# Altium PCB S28A模块化小车底板.pcbdoc (part 1 of 2)
Units mil, origin at the board's own origin, x right, y up, seen from the top; angles counter-clockwise.
Board outline 5579.41 x 4352.55 mil, 2 copper layers (Top Layer, Bottom Layer); 38 components, 47 nets, 158 pads, 338 vias.
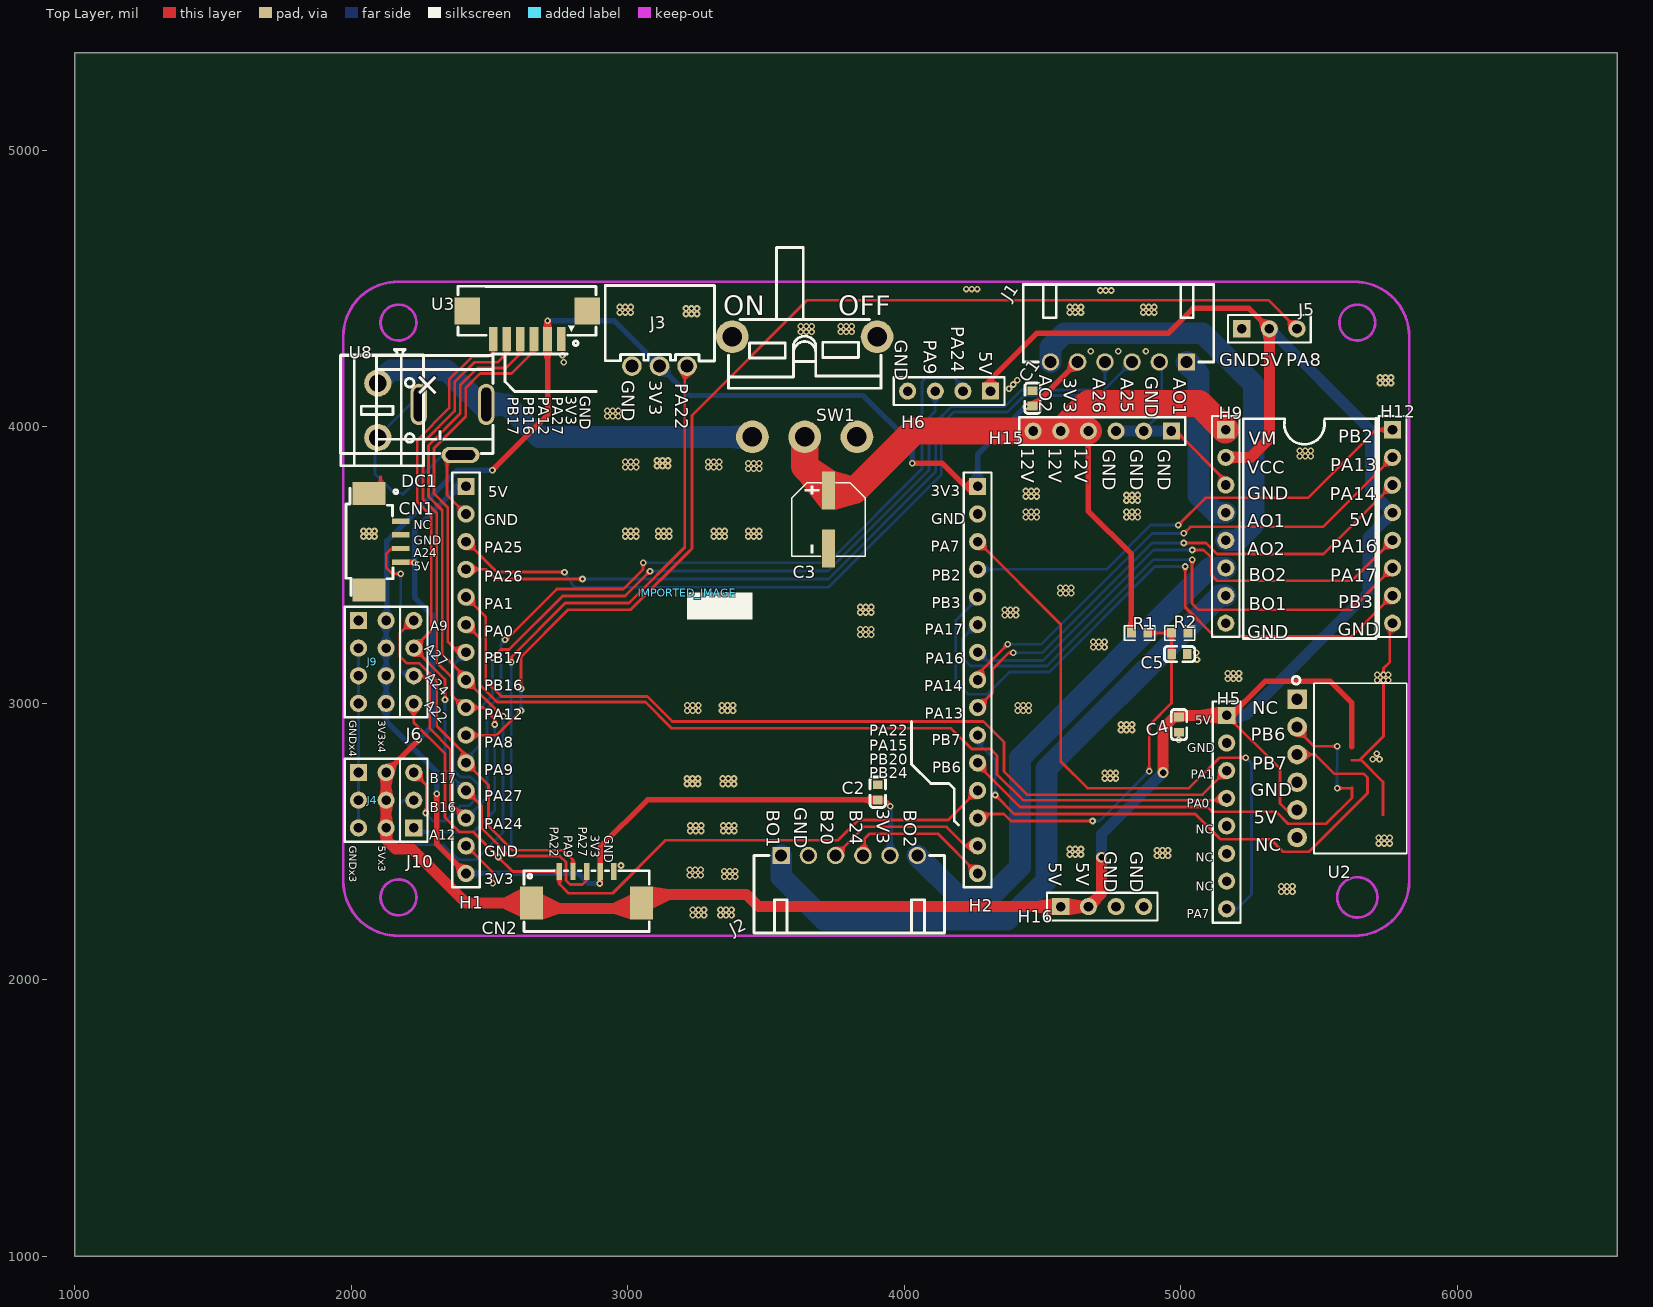
[diagram p0: Top Layer view]
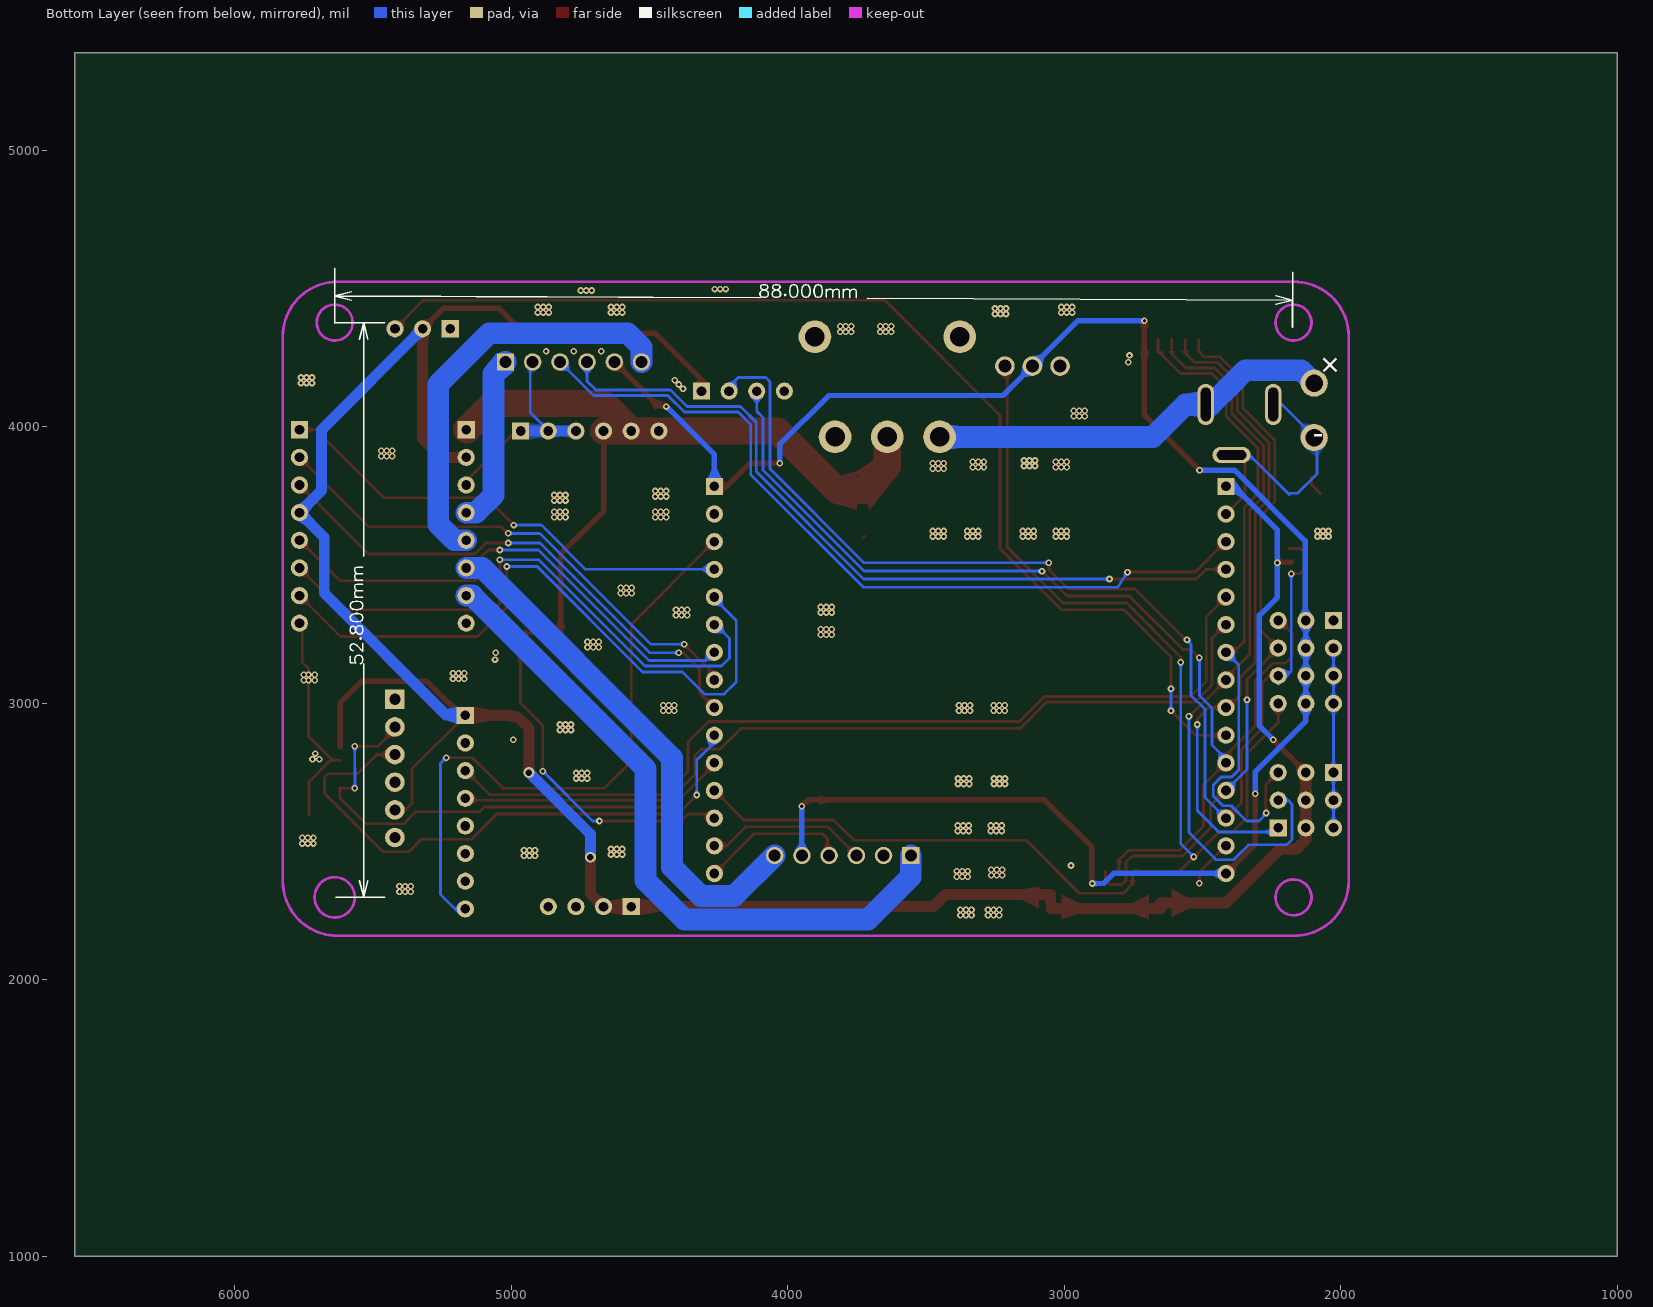
[diagram p1: Bottom Layer view, seen from below]

## Layer stack, top to bottom
Top Layer: signal copper (thickness not stored)
Dielectric: dielectric 12.6, FR-4, Dk 4.8
Bottom Layer: signal copper (thickness not stored)

## Board outline
6579.41,1000 1000,1000 1000,5352.55 6579.41,5352.55

## Components (designator, comment, footprint, x,y, rotation, side; value= is the part's Value field where it differs from the comment)
C1 "0.1u" C0603 4464.41,4102.55 r270 top
C2 "0.1u" C0603 3904.41,2677.55 r270 top
C3 "220uF" CAP-SMD_BD6.3-L6.6-W6.6-LS7.4-FD 3726.54,3663.93 r270 top
C4 "0.1u" C0603 4994.41,2922.55 r90 top
C5 "0.1u" C0603 4995.91,3177.55 r180 top
CN1 "1.25-4P WT" CONN-SMD_1.25-4PWT 2121.54,3583.93 r90 top
CN2 "1.25-5P WT" CONN-SMD_1.25-5PWT 2851.54,2333.93 r180 top
DC1 "DC-005A-20A" DC-IN-TH_DC-005A-20A 2366.54,3988.93 r90 top
H1 "HDR-F-2.54_1x15" HDR-F-2.54_1X15 2415.36,3083.93 r270 top
H2 "C8T6" HDR-F-2.54_1X15 4265.74,3083.93 r270 top
H5 "MPU6050" HDR-F-2.54_1X8 5166.53,2655.82 r270 top
H6 "超声波" HDR-F-2.54_1X4 4162.6,4128.26 r180 top
H9 "HDR-F-2.54_1x8" HDR-F-2.54_1X8 5163.38,3688.93 r270 top
H12 "HDR-F-2.54_1x8" HDR-F-2.54_1X8 5766.54,3688.93 r270 top
H15 "12TO5" HDR-F-2.54_1X6 4766.53,3983.93 r180 top
H16 "12TO5" HDR-F-2.54_1X4 4716.53,2263.93 r0 top
IMPORTED_IMAGE "IMPORTED_IMAGE" IMPORTED_IMAGE 3215.32,3398.42 r0 top
J1 "X8821WR-06S-N0SN" CONN-TH_6P-P2.50_X8821WR-06S-N2SN 4775.27,4233.93 r180 top
J2 "X8821WR-06S-N0SN" CONN-TH_6P-P2.50_X8821WR-06S-N2SN 3801.54,2448.93 r0 top
J3 "XH-3AW_C2908612" CONN-TH_3P-P2.54_HCTL_XH-3AW 3115.28,4218.93 r0 top
J4 "HDR-M-2.54_2x3" HDR-M-2.54_2X3 2026.54,2748.93 r270 top
J5 "舵机接口" HDR-M-2.54_1X3 5320.9,4353.93 r0 top
J6 "HDR-M-2.54_1x4" HDR-M-2.54_1X4 2226.54,3148.93 r90 top
J9 "HDR-M-2.54_2x4" HDR-M-2.54_2X4 2076.54,3148.93 r270 top
J10 "HDR-M-2.54_1x3" HDR-M-2.54_1X3 2226.54,2648.93 r90 top
R1 "10k" R0603 4851.54,3253.93 r0 top
R2 "1k" R0603 4996.54,3253.93 r0 top
SW1 "SS-12D11G5" SW-TH_SS-12D11G5 3640.27,4143.93 r180 top
U2 "DW254W-11-06-85" CONN-TH_6P-P2.54_DEALON_DW254W-11-06-85 5421.54,2763.93 r270 top
U3 "HC-1.25-6PWT" CONN-SMD_6P-P1.25_HC-1.25-6PWT 2636.54,4367.55 r180 top
U8 "DB301V-5.0-2P-BU-P" CONN-TH_2P-P5.00_DB301V-5.0-2P-BU-P 2096.54,4058.93 r90 top
? "" ? 3906.67,4466.2 r0 top
? "" ? 5546.08,3336.92 r0 top
? "" ? 3404.04,2012.7 r0 top
? "" ? 3269.04,1945.46 r0 top
? "" ? 5665.84,3321.43 r0 top
? "" ? 1769.27,2858.93 r0 top
? "" ? 5409.04,2061.33 r0 top

## Footprints (in the part's own frame and the unit in brackets; to place one, negate y for a bottom-side part, rotate by r counter-clockwise, add the part's x,y. Pads: shape width x height; smd on the part's side, far side on the other; paste and mask are expansions set on the pad)
C0603 [mm]
  rect 0.8x0.9 smd paste+0 mask+0.051: 1(-0.7,0) 2(0.7,0)
  silkscreen extent -1.41,-0.71 1.39,0.72
CAP-SMD_BD6.3-L6.6-W6.6-LS7.4-FD [mm]
  rect 3.5x1.2 smd paste+0 mask+0.051: 1(-2.67,0) 2(2.67,0)
  silkscreen extent -3.38,-3.38 3.38,3.38
CONN-SMD_1.25-4PWT [mm]
  rect 0.5x1.6 smd paste+0 mask+0.051: 1(1.875,-1.45) 2(0.625,-1.45) 3(-0.625,-1.45) 4(-1.875,-1.45)
  rect 2.1x3 smd paste+0 mask+0.051: 5(4.425,1.45) 6(-4.425,1.45)
  silkscreen extent -4.95,-1.2 4.9,3.55
CONN-SMD_1.25-5PWT [mm]
  rect 0.5x1.6 smd paste+0 mask+0.051: 1(2.5,-1.45) 2(1.25,-1.45) 3(0,-1.45) 4(-1.25,-1.45) 5(-2.5,-1.45)
  rect 2.1x3 smd paste+0 mask+0.051: 6(5.05,1.45) 7(-5.05,1.45)
  silkscreen extent -5.75,-1.52 5.75,4.05
CONN-SMD_6P-P1.25_HC-1.25-6PWT [mm]
  rect 0.8x2.2 smd paste+0 mask+0.05: 1(-3.125,1.3) 2(-1.875,1.3) 3(-0.625,1.3) 4(0.625,1.3) 5(1.875,1.3) 6(3.125,1.3)
  rect 2.35x2.5 smd paste+0 mask+0.05: 7(-5.505,-1.3) 8(5.505,-1.3)
  silkscreen extent -6.33,-3.56 6.35,1.88
CONN-TH_2P-P5.00_DB301V-5.0-2P-BU-P [mm]
  round 2.5 hole 1.6 paste+0 mask+0.051: 1(-2.5,0) 2(2.5,0)
  silkscreen extent -5.08,-4.2 5.59,3.4
CONN-TH_3P-P2.54_HCTL_XH-3AW [mm]
  round 1.8 hole 1.199 paste+0 mask+0.051: 1(-2.54,0) 2(0.001,0) 3(2.54,0)
  silkscreen extent -4.98,0.46 5.04,7.4
CONN-TH_6P-P2.50_X8821WR-06S-N2SN [mm]
  rect 1.6x1.6 hole 1.1 paste+0 mask+0.051: 1(-6.25,0)
  round 1.6 hole 1.1 paste+0 mask+0.051: 2(-3.75,0) 3(-1.25,0) 4(1.25,0) 5(3.75,0) 6(6.25,0)
  silkscreen extent -8.75,-7.11 8.75,0
CONN-TH_6P-P2.54_DEALON_DW254W-11-06-85 [mm]
  rect 1.8x1.8 hole 1.02 paste+0 mask+0.05: 1(-6.35,0)
  round 1.8 hole 1.02 paste+0 mask+0.05: 2(-3.81,0) 3(-1.27,0) 4(1.27,0) 5(3.81,0) 6(6.35,0)
  silkscreen extent -8.46,-0.46 7.82,10.05
DC-IN-TH_DC-005A-20A [mm]
  oval 3.8x1.5 hole 0.9 slot 3.1 at 0 deg paste+0 mask+0.051: 1(2.325,-3.1) 2(2.325,3.1)
  oval 1.5x3.5 hole 0.9 slot 2.7 at 90 deg paste+0 mask+0.051: 3(-2.325,-0.722)
  silkscreen extent -2.17,-3.72 6.83,10.28
HDR-F-2.54_1X4 [mil]
  rect 62x62 hole 35 paste+0 mask+2: 1(-150,0)
  round 62 hole 35 paste+0 mask+2: 2(-50,0) 3(50,0) 4(150,0)
  silkscreen extent -200,-50 200,50
HDR-F-2.54_1X6 [mil]
  rect 62x62 hole 35 paste+0 mask+2: 1(-200,0)
  round 62 hole 35 paste+0 mask+2: 2(-100,0) 3(0,0) 4(100,0) 5(200,0) 6(300,0)
  silkscreen extent -250,-50 350,50
HDR-F-2.54_1X8 [mil]
  rect 62x62 hole 35 paste+0 mask+2: 1(-300,0)
  round 62 hole 35 paste+0 mask+2: 2(-200,0) 3(-100,0) 4(0,0) 5(100,0) 6(200,0) 7(300,0) 8(400,0)
  silkscreen extent -350,-50 450,50
HDR-F-2.54_1X15 [mil]
  rect 62x62 hole 35 paste+0 mask+2: 1(-700,0)
  round 62 hole 35 paste+0 mask+2: 2(-600,0) 3(-500,0) 4(-400,0) 5(-300,0) 6(-200,0) 7(-100,0) 8(0,0) 9(100,0) 10(200,0) 11(300,0) 12(400,0) 13(500,0) 14(600,0) 15(700,0)
  silkscreen extent -750,-50 750,50
HDR-M-2.54_1X3 [mil]
  rect 62x62 hole 35 paste+0 mask+2: 1(-100,0)
  round 62 hole 35 paste+0 mask+2: 2(0,0) 3(100,0)
  silkscreen extent -150,-50 150,50
HDR-M-2.54_1X4 [mil]
  round 62 hole 35 paste+0 mask+2: 1(-150,0) 2(-50,0) 3(50,0) 4(150,0)
  silkscreen extent -200,-50 200,50
HDR-M-2.54_2X3 [mil]
  rect 62x62 hole 35 paste+0 mask+2: 1(0,0)
  round 62 hole 35 paste+0 mask+2: 2(0,100) 3(100,0) 4(100,100) 5(200,0) 6(200,100)
  silkscreen extent -50,-50 250,150
HDR-M-2.54_2X4 [mil]
  rect 62x62 hole 35 paste+0 mask+2: 1(-150,-50)
  round 62 hole 35 paste+0 mask+2: 2(-150,50) 3(-50,-50) 4(-50,50) 5(50,-50) 6(50,50) 7(150,-50) 8(150,50)
  silkscreen extent -200,-100 200,100
IMPORTED_IMAGE [mil]
  silkscreen extent 0,-94 236,0
R0603 [mil]
  rect 31.75x34.02 smd paste-3937.01 mask+2: 1(-29.65,0) 2(29.66,0)
  silkscreen extent -55,-26 55,26
SW-TH_SS-12D11G5 [mm]
  round 3 hole 1.8 paste+0 mask+0.051: 1(4.8,4.6) 2(0,4.6) 3(-4.8,4.6) 4(-6.65,-4.6) 5(6.65,-4.6)
  silkscreen extent -7,-12.81 7,0.13
? [mil]

## Via types
v1: diameter 24, hole 12, Top Layer to Bottom Layer, tented both sides, 321 vias
v2: diameter 24.41, hole 12.2, Top Layer to Bottom Layer, tented both sides, 11 vias
v3: diameter 24.02, hole 12.2, Top Layer to Bottom Layer, tented both sides, 3 vias
v4: diameter 39.37, hole 23.62, Top Layer to Bottom Layer, tented both sides, 2 vias
v5: diameter 24.02, hole 12.01, Top Layer to Bottom Layer, tented both sides, 1 vias

## Nets (pads, with @x,y where several pads share a name; then routed paths per layer and width w, separated by ;. In a path a pad name is that pad's centre, name@x,y a point inside that pad or via, vN(x,y) a via of type N, cw(c..) or ccw(c..) an arc to the next point about the centre after c; other vN are vias at no path point)
3V3: C1.2 C2.2 CN2.4 H1.15 H2.1 J1.5 J2.5 J3.2 J9.2 J9.4 J9.6 J9.8 U3.2 | length 6803.9
  Top Layer w19.68: v2(2309.41,2672.55) 2309.41,2489.86 H1.15@2415.34,2383.93 ; v2(2510.91,3842.55) 2710.34,4041.93 2710.34,4316.33 v1@2710.34,4382.53 ; v2(2899.41,2347.55) 2900.74,2348.83 2900.74,2391.03 2900.74,2478.93 3071.84,2650.03 C2.2@3904.41,2649.99 3926.94,2650.03 v1(3949.44,2627.53) ; v3(4029.41,3867.55) 4137.94,3867.53 4221.54,3783.93 H2.1@4265.74,3783.93 ; v1(4439.41,4072.55) 4441.84,4075.03 C1.2@4464.41,4074.99 4468.74,4075.03 J1.5@4627.64,4233.93
  Bottom Layer w19.68: J9.2@2126.54,3268.93 2126.54,2968.93 2126.54,2935.42 2309.41,2752.55 v2(2309.41,2672.55) ; J9.2@2126.54,3298.93 2129.44,3301.83 2129.44,3586.83 2385.14,3842.53 v2(2510.91,3842.55) ; H1.15@2411.94,2383.93 2821.54,2383.93 2857.92,2347.55 v2(2899.41,2347.55) ; v1@2710.36,4382.55 2951.71,4382.55 J3.2@3115.32,4218.93 3221.74,4112.53 3851.54,4112.53 4029.41,3934.66 v3(4029.41,3867.55) ; J2.5@3949.14,2448.93 v1(3949.44,2627.53) ; H2.1@4265.74,3783.93 4265.74,3898.83 v1(4439.41,4072.55)
  other v1: 2710.36,4382.55
5V: C4.2 CN1.4 CN2.6 CN2.7 H1.1 H5.1 H6.1 H9.2 H12.4 H16.1 H16.2 J4.2 J4.4 J4.6 J5.2 U2.5 | length 10025.6
  Top Layer w10: H5.1@5166.53,2955.82 5359.44,2762.93 5359.44,2637.53 5383.04,2613.93 U2.5@5421.54,2613.93
  Top Layer w19.68: J4.2@2126.54,2748.93 2244.41,2866.8 v3(2244.41,2867.55) ; CN1.4@2178.62,3510.11 2226.84,3510.13 v2(2229.41,3507.55) ; H6.1@4312.64,4128.23 4312.64,4170.73 4479.44,4337.53 4954.44,4337.53 5044.44,4427.53 5247.24,4427.53 J5.2@5320.9,4353.93 ; H5.1@5166.53,2955.82 5171.84,2944.93 5305.84,3078.93 5541.54,3078.93 5619.44,3001.03 5619.44,2842.73
  Top Layer w39.37: J4.6@2126.54,2543.93 J4.2@2126.54,2748.93 ; J4.6@2126.54,2548.93 2126.54,2506.93 2160.94,2472.53 2219.44,2472.53 2415.14,2276.83 CN2.6@2652.72,2276.84 ; CN2.6@2650.94,2257.53 CN2.7@3048.54,2257.53 ; CN2.7@3050.34,2276.83 3050.34,2307.53 3429.44,2307.53 3473.04,2263.93 H16.2@4666.53,2263.93 4714.41,2311.8 v4(4714.41,2442.55) ; v4(4936.54,2748.93) 4936.54,2909.63 4976.94,2950.13 C4.2@4994.41,2950.11 5000.14,2955.83 H5.1@5166.53,2955.82 ; H9.2@5163.38,3888.93 5252.29,3888.93 5320.91,3957.55 J5.2@5320.9,4353.93
  Bottom Layer w19.68: v2(2229.41,3507.55) 2229.41,3382.55 2294.41,3317.55 2294.41,3131.05 2294.41,2917.55 v3(2244.41,2867.55) ; v2(2229.41,3507.55) 2229.44,3626.83 2386.54,3783.93 H1.1@2415.34,3783.93
  Bottom Layer w39.37: v4(4714.41,2442.55) 4714.41,2526.8 v4(4936.54,2748.93) ; H5.1@5171.84,2957.53 5235.94,2957.53 5676.54,3398.23 5676.54,3598.93 H12.4@5766.54,3688.93 5686.54,3768.93 5686.54,3988.33 J5.2@5320.9,4353.93
12V: C3.1 H9.1 H15.4 H15.5 H15.6 R1.1 SW1.2 | length 2728.7
  Top Layer w19.68: H15.4@4666.53,3983.93 4666.54,3693.93 4821.84,3538.63 R1.1@4821.84,3253.93
  Top Layer w98.42: SW1.2@3640.24,3962.83 3640.24,3855.33 C3.1@3726.54,3769.05 3820.94,3769.03 4035.84,3983.93 H15.4@4666.53,3983.93 ; H15.5@4566.53,3983.93 4666.54,4083.93 4749.64,4083.93 5066.54,4083.93 H9.1@5161.54,3988.93
AO1: H9.4 J1.1 | length 624.5
  Bottom Layer w78.74: J1.1@5021.34,4233.93 5064.44,4190.83 5064.44,3752.53 5128.04,3688.93 H9.4@5163.34,3688.93
AO2: H9.5 J1.6 | length 1516.4
  Bottom Layer w78.74: J1.6@4529.21,4233.93 4529.24,4287.33 4579.44,4337.53 5079.44,4337.53 5264.44,4152.53 5264.44,3647.53 5205.84,3588.93 H9.5@5163.34,3588.93
BO1: H9.7 J2.1 | length 2471.6
  Bottom Layer w78.74: J2.1@3555.44,2448.93 3555.44,2371.53 3709.44,2217.53 4374.44,2217.53 4514.44,2357.53 4514.44,2762.53 5034.44,3282.53 ; 5034.41,3282.55 5140.79,3388.93 H9.7@5163.38,3388.93
BO2: H9.6 J2.6 | length 1899.2
  Bottom Layer w78.74: J2.6@4047.6,2448.93 4193.99,2302.55 4314.41,2302.55 4419.41,2407.55 4419.41,2802.55 5105.79,3488.93 H9.6@5163.38,3488.93
GND: C1.1 C2.1 C3.2 C4.1 C5.1 CN1.2 CN1.5 CN1.6 CN2.5 DC1.2 DC1.3 H1.2 H1.14 H2.2 H5.2 H6.4 H9.3 H9.8 H12.8 H15.1 H15.2 H15.3 H16.3 H16.4 J1.2 J2.2 J3.1 J4.1 J4.3 J4.5 J5.1 J9.1 J9.3 J9.5 J9.7 R2.2 U2.4 U3.1 U3.7 U3.8 U8.1 | length 3451.4
  Top Layer w10: CN1.5@2074.44,3758.13 2106.54,3790.23 2106.54,3818.93 ; DC1.3@2374.94,3897.43 2346.54,3868.93 2346.54,3752.73 2415.34,3683.93 H1.2@2391.54,3683.93 ; H1.14@2416.54,2483.93 2511.54,2388.93 v1(2511.54,2348.93) ; C3.2@3721.54,3603.81 C3.2@3726.54,3598.81 ; H15.1@4966.53,3983.93 4983.04,3983.93 5163.34,3803.63 H9.3@5163.34,3788.93 ; 5731.54,2596.63 5731.54,2715.43 5653.44,2793.53 5619.44,2793.53 5646.84,2793.53 5733.64,2880.23 5733.64,2941.23 5733.64,3126.03 5756.54,3148.93 5756.54,3278.93 H12.8@5766.54,3288.93
  Bottom Layer w10: J4.5@2026.54,2548.93 J9.3@2026.54,3168.93 ; U8.1@2093.14,3960.53 2213.04,4080.43 DC1.2@2224.54,4080.43 ; U8.1@2096.54,3960.5 2086.54,3950.51 2086.54,3828.93 2156.54,3758.93 2186.54,3758.93 2186.54,3753.93 2330.04,3897.43 DC1.3@2374.94,3897.43 ; H15.2@4864.14,3983.93 4931.54,4051.33 J1.2@4931.54,4233.93
  Bottom Layer w39.37: H15.3@4766.53,3983.93 H15.1@4966.53,3983.93
  other v1: 3235.91,2232.55 3255.91,2232.55 3275.91,2232.55 3335.91,2232.55 3355.91,2232.55 3375.91,2232.55 3235.91,2252.55 3255.91,2252.55 3275.91,2252.55 3335.91,2252.55 3355.91,2252.55 3375.91,2252.55 5364.41,2317.55 5384.41,2317.55 5404.41,2317.55 5364.41,2337.55 5384.41,2337.55 5404.41,2337.55 3349.41,2372.55 3369.41,2372.55 3389.41,2372.55 3224.41,2377.55 3244.41,2377.55 3264.41,2377.55 3349.41,2392.55 3369.41,2392.55 3389.41,2392.55 3224.41,2397.55 3244.41,2397.55 3264.41,2397.55 2975.91,2412.55 4914.41,2447.55 4934.41,2447.55 4954.41,2447.55 4599.41,2452.55 4619.41,2452.55 4639.41,2452.55 4914.41,2467.55 4934.41,2467.55 4954.41,2467.55 4599.41,2472.55 4619.41,2472.55 4639.41,2472.55 5715.91,2492.55 5735.91,2492.55 5755.91,2492.55 5715.91,2512.55 5735.91,2512.55 5755.91,2512.55 3225.91,2537.55 3245.91,2537.55 3265.91,2537.55 3345.91,2537.55 3365.91,2537.55 3385.91,2537.55 3225.91,2557.55 3245.91,2557.55 3265.91,2557.55 3345.91,2557.55 3365.91,2557.55 3385.91,2557.55 3214.41,2707.55 3234.41,2707.55 3254.41,2707.55 3344.41,2707.55 3364.41,2707.55 3384.41,2707.55 3214.41,2727.55 3234.41,2727.55 3254.41,2727.55 3344.41,2727.55 3364.41,2727.55 3384.41,2727.55 4725.91,2727.55 4745.91,2727.55 4765.91,2727.55 4725.91,2747.55 4745.91,2747.55 4765.91,2747.55 5694.41,2797.55 5719.41,2797.55 5709.41,2817.55 4993.02,2867.22 4784.41,2902.55 4804.41,2902.55 4824.41,2902.55 4784.41,2922.55 4804.41,2922.55 4824.41,2922.55 3215.91,2972.55 3235.91,2972.55 3255.91,2972.55 3340.91,2972.55 3360.91,2972.55 3380.91,2972.55 4410.91,2972.55 4430.91,2972.55 4450.91,2972.55 3215.91,2992.55 3235.91,2992.55 3255.91,2992.55 3340.91,2992.55 3360.91,2992.55 3380.91,2992.55 4410.91,2992.55 4430.91,2992.55 4450.91,2992.55 5710.91,3082.55 5733.64,3082.55 5750.91,3082.55 5170.91,3087.55 5190.91,3087.55 5210.91,3087.55 5710.91,3102.55 5733.64,3102.55 5750.91,3102.55 5170.91,3107.55 5190.91,3107.55 5210.91,3107.55 5059.41,3157.55 5055.91,3182.55 4684.41,3202.55 4704.41,3202.55 4724.41,3202.55 4684.41,3222.55 4704.41,3222.55 4724.41,3222.55 3840.91,3247.55 3860.91,3247.55 3880.91,3247.55 3840.91,3267.55 3860.91,3267.55 3880.91,3267.55 4364.41,3317.55 4384.41,3317.55 4404.41,3317.55 3840.91,3327.55 3860.91,3327.55 3880.91,3327.55 4364.41,3337.55 4384.41,3337.55 4404.41,3337.55 3840.91,3347.55 3860.91,3347.55 3880.91,3347.55 4564.41,3397.55 4584.41,3397.55 4604.41,3397.55 4564.41,3417.55 4584.41,3417.55 4604.41,3417.55 2044.41,3602.55 2064.41,3602.55 2084.41,3602.55 2990.91,3602.55 3010.91,3602.55 3030.91,3602.55 3110.91,3602.55 3130.91,3602.55 3150.91,3602.55 3310.91,3602.55 3330.91,3602.55 3350.91,3602.55 3435.91,3602.55 3455.91,3602.55 3475.91,3602.55 2044.41,3622.55 2064.41,3622.55 2084.41,3622.55 2990.91,3622.55 3010.91,3622.55 3030.91,3622.55 3110.91,3622.55 3130.91,3622.55 3150.91,3622.55 3310.91,3622.55 3330.91,3622.55 3350.91,3622.55 3435.91,3622.55 3455.91,3622.55 3475.91,3622.55 4439.41,3672.55 4459.41,3672.55 4479.41,3672.55 4804.41,3672.55 4824.41,3672.55 4844.41,3672.55 4439.41,3692.55 4459.41,3692.55 4479.41,3692.55 4804.41,3692.55 4824.41,3692.55 4844.41,3692.55 4804.41,3732.55 4824.41,3732.55 4844.41,3732.55 4439.41,3747.55 4459.41,3747.55 4479.41,3747.55 4804.41,3752.55 4824.41,3752.55 4844.41,3752.55 4439.41,3767.55 4459.41,3767.55 4479.41,3767.55 3435.91,3847.55 3455.91,3847.55 3475.91,3847.55 2990.91,3852.55 3010.91,3852.55 3030.91,3852.55 3290.91,3852.55 3310.91,3852.55 3330.91,3852.55 3105.91,3857.55 3125.91,3857.55 3145.91,3857.55 3435.91,3867.55 3455.91,3867.55 3475.91,3867.55 2990.91,3872.55 3010.91,3872.55 3030.91,3872.55 3290.91,3872.55 3310.91,3872.55 3330.91,3872.55 3105.91,3877.55 3125.91,3877.55 3145.91,3877.55 5430.91,3892.55 5450.91,3892.55 5470.91,3892.55 5430.91,3912.55 5450.91,3912.55 5470.91,3912.55 2925.91,4037.55 2945.91,4037.55 2965.91,4037.55 2925.91,4057.55 2945.91,4057.55 2965.91,4057.55 4379.41,4137.55 4394.41,4152.55 5720.91,4157.55 5740.91,4157.55 5760.91,4157.55 4409.41,4167.55 5720.91,4177.55 5740.91,4177.55 5760.91,4177.55 2769.41,4232.55 2764.41,4257.55 4674.41,4272.55 4774.41,4272.55 4874.41,4272.55 3625.91,4342.55 3645.91,4342.55 3665.91,4342.55 3770.91,4342.55 3790.91,4342.55 3810.91,4342.55 3625.91,4362.55 3645.91,4362.55 3665.91,4362.55 3770.91,4362.55 3790.91,4362.55 3810.91,4362.55 3210.91,4407.55 3230.91,4407.55 3250.91,4407.55 2970.91,4412.55 2990.91,4412.55 3010.91,4412.55 4599.41,4412.55 4619.41,4412.55 4639.41,4412.55 4864.41,4412.55 4884.41,4412.55 4904.41,4412.55 3210.91,4427.55 3230.91,4427.55 3250.91,4427.55 2970.91,4432.55 2990.91,4432.55 3010.91,4432.55 4599.41,4432.55 4619.41,4432.55 4639.41,4432.55 4864.41,4432.55 4884.41,4432.55 4904.41,4432.55 4709.41,4492.55 4729.41,4492.55 4749.41,4492.55 4224.41,4497.55 4244.41,4497.55 4264.41,4497.55
PA0: H1.10 J5.3 | length 4096.5
  Top Layer w10: H1.10@2415.36,2883.93 2525.79,2883.93 v1(2614.41,2972.55) ; v1(2614.41,3052.55) 2614.41,3167.55 2784.41,3337.55 3010.91,3337.55 3220.91,3547.55 ; 3220.94,3547.53 3232.64,3559.33 3232.64,4040.73 3649.44,4457.53 5317.34,4457.53 J5.3@5420.9,4353.93
  Bottom Layer w10: v1(2614.41,2972.55) v1(2614.41,3052.55)
PA1: CN2.2 H1.11 H6.3 J6.4 | length 3896.2
  Top Layer w10: J6.4@2226.54,3293.93 2216.54,3293.93 2176.54,3253.93 2176.54,3168.93 2201.54,3143.93 2246.54,3143.93 2309.44,3081.03 2309.44,2917.53 2415.34,2811.63 H1.11@2415.34,2783.93 ; H1.11@2416.54,2783.93 2496.54,2703.93 2496.54,2555.43 2584.44,2467.53 2767.94,2467.53 2802.34,2433.13 CN2.2@2802.33,2391.01 ; v3(2511.54,3163.93) 2541.54,3193.93 2571.54,3193.93 2765.14,3387.53 2990.94,3387.53 v1(3080.91,3477.55)
  Bottom Layer w10: H1.11@2415.34,2783.93 2415.34,2797.73 2465.94,2848.33 2465.94,2982.53 2511.54,3028.23 v3(2511.54,3163.93) ; v1(3080.91,3477.55) 3724.44,3477.53 4089.44,3842.53 4089.44,4032.53 4112.64,4055.73 H6.3@4112.64,4128.23
PA2: CN2.3 H1.12 J6.3 U3.6 | length 2604.5
  Top Layer w10: v5(2339.41,3012.55) 2339.41,3086.06 J6.3@2226.54,3198.93 2289.44,3261.83 2289.44,3677.53 2239.44,3727.53 2239.44,3951.83 2354.44,4066.83 2354.44,4170.43 2436.54,4252.53 2494.44,4252.53 2513.54,4271.73 U3.6@2513.54,4316.33 ; H1.12@2416.54,2683.93 2471.54,2628.93 2471.54,2548.93 2572.94,2447.53 2754.04,2447.53 2776.54,2425.03 2776.54,2358.93 2791.54,2343.93 2836.54,2343.93 2851.54,2358.93 CN2.3@2851.54,2391.01
  Bottom Layer w10: v5(2339.41,3012.55) 2339.41,2759.88 H1.12@2415.36,2683.93
PA3: CN1.3 H1.13 H6.2 J6.2 | length 4192.2
  Top Layer w10: v2(2179.41,3467.55) 2149.44,3467.53 2126.54,3490.43 2126.54,3539.63 2146.24,3559.33 CN1.3@2188.64,3559.33 ; J6.2@2226.54,3098.93 2258.04,3098.93 2284.44,3072.53 2284.44,2907.53 2359.44,2832.53 2359.44,2639.83 H1.13@2415.34,2583.93 ; v1(2556.54,3228.93) 2560.24,3228.93 2743.84,3412.53 2985.14,3412.53 3055.94,3483.33 v1(3055.91,3507.55)
  Bottom Layer w10: v2(2179.41,3467.55) 2179.41,3116.06 J6.2@2226.54,3068.93 ; H1.13@2416.54,2583.93 2491.54,2658.93 2491.54,2978.23 2541.54,3028.23 2541.54,3213.93 v1(2556.54,3228.93) ; v1(3055.91,3507.55) 3724.44,3507.53 4064.44,3847.53 4064.44,4162.53 4079.44,4177.53 4179.44,4177.53 4212.64,4144.33 H6.2@4212.64,4128.23
PA6: H2.15 J2.4 | length 536.8
  Top Layer w10: J2.4@3856.54,2448.93 3856.54,2509.63 3874.44,2527.53 4122.14,2527.53 H2.15@4265.74,2383.93
PA7: H2.14 J2.3 | length 594.7
  Top Layer w10: J2.3@3742.34,2448.93 3751.54,2448.93 3855.14,2552.53 4152.94,2552.53 4221.54,2483.93 H2.14@4265.74,2483.93
PA8: H2.5 H12.7 | length 2381.6
  Top Layer w10: v1(5016.54,3493.93) 5016.54,3346.93 5122.64,3240.83 5618.44,3240.83 H12.7@5766.54,3388.93
  Bottom Layer w10: H2.5@4265.74,3383.93 4265.74,3377.43 4186.54,3298.23 4186.54,3076.93 4230.94,3032.53 4300.94,3032.53 4380.94,3112.53 4525.14,3112.53 4906.54,3493.93 v1(5016.54,3493.93)
PA11: H2.4 H12.1 | length 1715.4
  Top Layer w10: v1(4991.54,3643.93) 5090.16,3742.55 5460.91,3742.55 5664.77,3946.41 ; 5660.94,3942.53 5707.24,3988.93 H12.1@5766.54,3988.93
  Bottom Layer w10: H2.4@4265.74,3483.93 4731.54,3483.93 4891.54,3643.93 v1(4991.54,3643.93)
PA12: H2.3 H5.8 | length 2294.3
  Top Layer w10: H2.3@4266.54,3583.93 4566.54,3283.93 4566.54,2788.93 4662.94,2692.53 5030.94,2692.53 5140.94,2802.53 v1(5235.94,2802.53)
  Bottom Layer w10: H5.8@5166.53,2255.82 5204.14,2255.83 ; 5198.04,2255.83 5204.14,2255.83 ; v1(5235.94,2802.53) 5255.94,2782.53 5255.94,2307.53 5204.14,2255.83
PB0: C5.2 H2.13 R1.2 R2.1 | length 1330.8
  Top Layer w10: H2.13@4265.74,2583.93 4280.75,2598.93 4361.54,2598.93 4386.54,2573.93 v1(4681.54,2573.93) ; R1.2@4881.19,3253.93 4966.84,3253.93 4966.84,2999.93 4886.54,2919.63 v1(4886.54,2753.93)
  Bottom Layer w10: v1(4681.54,2573.93) 4706.54,2573.93 v1(4886.54,2753.93)
PB1: CN2.1 H2.12 J3.3 J6.1 | length 4873.2
  Top Layer w10: J6.1@2226.54,2998.93 2226.54,2930.43 2339.44,2817.53 2339.44,2586.03 2391.54,2533.93 2441.54,2533.93 v2(2531.54,2443.93) 2584.44,2391.03 CN2.1@2753.11,2391.01 2753.14,2345.33 2785.94,2312.53 2945.94,2312.53 3137.34,2503.93 3760.84,2503.93 3834.44,2577.53 4159.34,2577.53 H2.12@4265.74,2683.93 ; v2(2579.41,3147.55) 2579.41,3167.54 2774.41,3362.55 3005.16,3362.55 3206.54,3563.93 3206.54,4210.19 J3.3@3215.28,4218.93
  Bottom Layer w10: v2(2531.54,2443.93) 2579.41,2491.8 v2(2579.41,3147.55)
PB6: H1.3 J1.3 | length 2926.8
  Top Layer w10: H1.3@2416.54,3583.93 2526.54,3473.93 v1(2771.54,3473.93)
  Bottom Layer w10: v1(2771.54,3473.93) 2806.54,3418.93 3725.84,3418.93 4134.44,3827.53 4134.44,4007.53 4179.44,4052.53 4374.44,4052.53 4434.44,4112.53 4703.14,4112.53 J1.3@4824.49,4233.93
PB7: H1.4 J1.4 | length 2794.6
  Top Layer w10: H1.4@2416.54,3483.93 2488.04,3483.93 2523.04,3448.93 v2(2836.54,3448.93)
  Bottom Layer w10: v2(2836.54,3448.93) 3725.84,3448.93 4114.44,3837.53 4114.44,4016.03 4170.94,4072.53 4364.44,4072.53 4424.44,4132.53 4694.44,4132.53 4726.04,4164.23 J1.4@4726.04,4233.93
PB8: H1.5 H5.3 | length 3282.1
  Top Layer w10: H1.5@2415.34,3383.93 2486.54,3312.73 2486.54,3080.43 2543.04,3023.93 3071.54,3023.93 3161.54,2933.93 3846.54,2933.93 4286.54,2933.93 4360.94,2859.53 4360.94,2752.53 4444.54,2668.93 5079.64,2668.93 H5.3@5166.53,2755.82
PB9: H1.6 H5.4 | length 3176.9
  Top Layer w10: H1.6@2416.54,3283.93 2465.94,3234.53 2465.94,3066.03 2528.04,3003.93 3064.54,3003.93 3159.54,2908.93 4169.54,2908.93 4244.54,2833.93 4313.04,2833.93 4335.94,2811.03 4335.94,2742.53 4429.54,2648.93 H5.4@5191.54,2648.93
PB10: H2.11 U2.2 | length 1909.8
  Top Layer w10: H2.11@4265.74,2783.93 4265.74,2777.73 4419.54,2623.93 4991.54,2623.93 5096.54,2623.93 5112.94,2607.53 5344.44,2607.53 5388.04,2563.93 5525.84,2563.93 5619.44,2657.53 5619.44,2695.13 5616.94,2692.53 v1(5565.91,2692.55) ; U2.2@5421.54,2913.93 5421.54,2905.43 5483.04,2843.93 v1(5566.54,2843.93)
  Bottom Layer w10: v1@5565.91,2692.55 v1(5566.54,2843.93)
PB11: H2.10 U2.3 | length 2107.5
  Top Layer w10: v1(4329.41,2667.55) 4398.04,2598.93 5053.04,2598.93 5144.44,2507.53 5325.94,2507.53 5370.94,2462.53 5464.44,2462.53 5675.94,2674.03 5675.94,2731.03 5662.64,2744.33 5619.44,2744.33 5556.14,2744.33 5486.54,2813.93 U2.3@5421.54,2813.93
  Bottom Layer w10: H2.10@4265.74,2883.93 4265.74,2857.73 4329.41,2794.06 v1(4329.41,2667.55)
PB12: H2.9 H12.3 | length 1917.1
  Top Layer w10: H2.9@4265.74,2983.93 4319.44,3037.63 4319.44,3122.53 4379.44,3182.53 v1(4394.41,3182.55) ; v1(5011.54,3578.93) 5091.54,3578.93 5131.54,3538.93 5516.54,3538.93 H12.3@5766.54,3788.93
  Bottom Layer w10: v1(4394.41,3182.55) 4500.16,3182.55 4896.54,3578.93 v1(5011.54,3578.93)
PB13: H2.8 H12.2 | length 1845.9
  Top Layer w10: H2.8@4265.74,3083.93 4265.75,3103.89 v1(4374.41,3212.55) ; v1(5011.54,3613.93) 5035.14,3637.53 5515.14,3637.53 H12.2@5766.54,3888.93
  Bottom Layer w10: v1(4374.41,3212.55) 4495.16,3212.55 4726.34,3443.73 4896.54,3613.93 v1(5011.54,3613.93)
PB14: H2.7 H12.5 | length 1822.1
  Top Layer w10: v1(5041.54,3553.93) 5083.04,3553.93 5110.94,3526.03 5110.94,3462.53 5130.94,3442.53 5620.14,3442.53 H12.5@5766.54,3588.93
  Bottom Layer w10: H2.7@4266.54,3183.93 4296.54,3153.93 4501.54,3153.93 4901.54,3553.93 v1(5041.54,3553.93)
PB15: H2.6 H12.6 | length 2100
  Top Layer w10: v1(5041.54,3518.93) 5041.54,3360.43 5064.44,3337.53 5615.14,3337.53 H12.6@5766.54,3488.93
  Bottom Layer w10: H2.6@4261.54,3283.93 4210.94,3233.33 4210.94,3162.53 4239.54,3133.93 4516.54,3133.93 4901.54,3518.93 v1(5041.54,3518.93)
PC13: H1.7 J10.3 U3.3 | length 2436
  Top Layer w10: J10.3@2211.54,2748.93 J10.3@2226.54,2748.93 2271.54,2703.93 2271.54,2602.55 v2(2269.41,2602.55) ; H1.7@2415.34,3183.93 2388.04,3183.93 2349.44,3222.53 2349.44,3707.53 2299.44,3757.53 2299.44,3921.83 2414.44,4036.83 2414.44,4140.43 2466.54,4192.53 2579.44,4192.53 2661.14,4274.23 U3.3@2661.14,4316.33
  Bottom Layer w10: v2(2269.41,2602.55) 2269.41,2601.06 2296.54,2573.93 2341.54,2573.93 2396.54,2628.93 2426.54,2628.93 2461.54,2663.93 2461.54,2703.33 2432.34,2732.53 2394.43,2732.53 2369.41,2757.55 2369.41,3138 H1.7@2415.34,3183.93
PC14: H1.8 J10.2 U3.4 | length 2727.8
  Top Layer w10: v2(2549.41,2952.55) 2546.74,2952.53 2415.34,3083.93 2415.34,3091.63 2329.44,3177.53 2329.44,3697.53 2279.44,3747.53 2279.44,3931.83 2394.44,4046.83 2394.44,4150.43 2456.54,4212.53 2559.44,4212.53 2611.94,4265.03 U3.4@2611.94,4316.33
  Bottom Layer w10: v2(2549.41,2952.55) 2549.41,2531.8 2451.54,2433.93 2387.25,2433.93 2333.6,2487.58 2195.89,2487.58 2176.54,2506.93 2176.54,2633.93 2191.54,2648.93 ; 2191.54,2648.93 2211.54,2648.93 2191.54,2648.93
PC15: H1.9 J10.1 U3.5 | length 2382.2
  Top Layer w10: H1.9@2415.34,2983.93 2408.04,2983.93 2364.44,3027.53 2364.44,3092.53 2309.44,3147.53 2309.44,3687.53 2259.44,3737.53 2259.44,3941.83 2374.44,4056.83 2374.44,4161.83 2445.14,4232.53 2529.44,4232.53 2562.74,4265.83 U3.5@2562.74,4316.33 ; H1.9@2416.54,2983.93 2478.04,2983.93 2519.44,2942.53 v2(2519.41,2922.55)
  Bottom Layer w10: J10.1@2211.54,2548.93 2211.54,2533.93 2441.54,2533.93 2519.44,2611.83 v2(2519.41,2922.55)
S$14509: 
S$14513: 
S$112028: 
S$113267: 
S$157343: 
S$165578: 
S$166494: 
S$217770: 
S$217807: 
S$226904: 
S$227004: 
S$232476: 
S$1655789: 
S$1664941: 
VIN_SW: DC1.1 SW1.1 U8.2 | length 1474
  Bottom Layer w78.74: U8.2@2096.54,4157.35 2143.14,4203.93 2345.14,4203.93 2468.64,4080.43 2488.64,4080.43 2561.54,4080.43 2679.14,3962.83 SW1.1@3451.3,3962.83
pads on no net: CN1.1 H5.5 H5.6 H5.7 SW1.3 SW1.4 SW1.5 U2.1 U2.6

## Polygon pours and split planes (outlines as drawn)
GND on Bottom Layer (solid): 1864.41,4842.55 5879.41,4842.55 5889.41,4852.55 5889.41,1697.55 5844.41,1652.55 2049.41,1652.55 1934.41,1537.55
GND on Top Layer (solid): 1539.41,4670.05 6009.41,4670.05 6014.41,4675.05 6014.41,1855.05 6079.41,1790.05 1539.41,1790.05 1529.41,1800.05

## Keep-outs
Keep-Out Layer:
  circle w10: c2171.26,4376.29 r64.96
  circle w10 net S$217770: c2171.26,2297.55 r64.96
  circle w10: c5638.97,2297.55 r72.84
  circle w10 net S$217807: c5638.97,4376.29 r64.96
  lines w10: 1971.54,2355.58 ccw(c2168.39,2355.58) 2168.39,2158.73 ; 1971.54,4327.07 cw(c2168.39,4327.07) 2168.39,4523.92 ; 5629.68,2158.73 ccw(c5629.68,2355.58) 5826.53,2355.58 ; 5629.68,4523.92 cw(c5629.68,4327.07) 5826.53,4327.07

## Other copper
Top Layer:
  pour cut-out net S$227004: 5515.91,2302.55 cw(c5639.02,2302.55) 5762.13,2302.55 cw(c5639.02,2302.55) 5515.91,2302.55
  pour cut-out net S$226904: 5517.8,4377.55 cw(c5640.91,4377.55) 5764.02,4377.55 cw(c5640.91,4377.55) 5517.8,4377.55
  pour cut-out net S$165578: 2045.91,4372.55 cw(c2169.02,4372.55) 2292.13,4372.55 cw(c2169.02,4372.55) 2045.91,4372.55
  pour cut-out net S$166494: 2047.8,2297.55 cw(c2170.91,2297.55) 2294.02,2297.55 cw(c2170.91,2297.55) 2047.8,2297.55
  region net 5V: 2149.79,2569.43 2103.29,2569.43 2106.85,2591.13 2146.22,2591.13
  region net 5V: 2149.79,2528.42 2103.29,2528.42 2106.85,2506.93 2146.22,2506.93
  region net 5V: 2149.79,2628.42 2103.29,2628.42 2106.85,2606.72 2146.22,2606.72
  region net 5V: 2149.79,2669.43 2103.29,2669.43 2106.85,2691.13 2146.22,2691.13
  region net 5V: 2149.79,2728.42 2103.29,2728.42 2106.85,2706.72 2146.22,2706.72
  region net 5V: 2124.6,2779.87 2157.48,2746.99 2163.34,2771.81 2149.42,2785.73
  region net PC13: 2224.6,2717.99 2257.48,2750.87 2259.92,2722.62 2252.85,2715.55
  region net PB10: 5456.9,2911.72 5414.93,2879.12 5447.15,2872.74 5455.11,2878.92
  region net PB11: 5444.97,2787.35 5444.97,2840.5 5469.78,2818.93 5469.78,2808.93
  region net 5V: 5398.1,2587.35 5398.1,2640.5 5383.03,2618.93 5383.03,2608.93
  region net PB1: 2249.79,2978.42 2203.29,2978.42 2221.54,2956.72 2231.54,2956.72
  region net PA3: 2247.04,3075.68 2247.04,3122.18 2258.03,3103.93 2258.03,3093.93
  region net PA2: 2224.6,3229.87 2257.48,3196.99 2259.92,3225.24 2252.84,3232.31
  region net PA2: 2224.6,3167.99 2257.48,3200.87 2259.92,3172.62 2252.85,3165.55
  region net PA1: 2225.88,3267.94 2195.87,3303.46 2191.06,3275.52 2197.54,3267.86
  region net 12V: 3684.57,3923.77 3595.99,3923.77 3591.07,3882.43 3689.49,3882.43
  region net PA0: 5389.96,4352.01 5422.86,4384.87 5394.61,4387.33 5387.54,4380.26
  region net 5V: 5344.15,4333.43 5297.65,4333.42 5301.22,4311.72 5340.59,4311.73
  region net 5V: 5289.96,4351.99 5322.84,4384.87 5298.01,4390.73 5284.09,4376.81
  region net PB1: 3237.17,4191.07 3184.9,4200.7 3201.54,4172.41 3211.54,4170.57
  region net 3V3: 2384.42,2381.98 2417.29,2414.87 2392.46,2420.72 2378.55,2406.8
  region net PA3: 2384.42,2581.98 2417.29,2614.87 2389.04,2617.3 2381.97,2610.22
  region net PA2: 2414.03,2652.96 2446.25,2686.48 2449.25,2658.29 2442.32,2651.08
  region net PA1: 2431.42,2810.44 2387.04,2796.55 2397.37,2822.52 2408.14,2825.89
  region net PA1: 2414.03,2752.96 2446.25,2786.48 2449.25,2758.29 2442.32,2751.08
  region net PA0: 2435.86,2860.68 2435.86,2907.18 2457.56,2888.93 2457.56,2878.93
  region net PC15: 2435.86,2960.68 2435.86,3007.18 2457.56,2988.93 2457.56,2978.93
  region net PC15: 2413.49,3014.87 2384.89,2978.2 2378.98,3005.91 2385.17,3013.86
  region net PC14: 2413.41,3052.99 2446.3,3085.86 2448.73,3057.61 2441.65,3050.54
  region net PC14: 2421.26,3114.36 2384.42,3085.98 2385.61,3114.29 2393.59,3120.44
  region net PC13: 2402.92,3212.32 2388.74,3168.04 2373.45,3191.44 2376.88,3202.15
  region net PB9: 2414.03,3252.96 2446.25,3286.48 2449.25,3258.29 2442.32,3251.08
  region net PB8: 2413.4,3352.99 2446.3,3385.86 2448.73,3357.61 2441.65,3350.54
  region net PB7: 2435.86,3460.68 2435.86,3507.18 2457.56,3488.93 2457.56,3478.93
  region net PB6: 2414.03,3552.96 2446.25,3586.48 2449.25,3558.29 2442.32,3551.08
  region net PA6: 4234.81,2381.98 4267.68,2414.87 4239.43,2417.3 4232.36,2410.23
  region net PA7: 4245.24,2460.68 4245.24,2507.18 4223.54,2488.93 4223.54,2478.93
  region net PB0: 4293.18,2569.48 4276.65,2612.95 4303.29,2603.93 4307.1,2593.93
  region net PB1: 4234.81,2685.88 4267.68,2652.99 4239.43,2650.55 4232.36,2657.63
  region net PB10: 4296.72,2782.64 4260.6,2753.36 4288.42,2747.98 4296.23,2754.31
  region net PB12: 4263.81,3014.87 4296.69,2981.99 4299.13,3010.24 4292.05,3017.31
  region net PB13: 4295.55,3092.44 4253.57,3112.44 4279.1,3124.31 4288.68,3119.75
  region net PA12: 4264.22,3552.97 4296.66,3586.28 4299.47,3558.07 4292.49,3550.9
  region net PB8: 5135.59,2757.76 5168.47,2724.88 5140.22,2722.44 5133.15,2729.51
  region net PB9: 5150.09,2629.53 5142.5,2675.41 5124.06,2653.93 5125.72,2643.93
  region net 5V: 5183.88,3865.68 5183.88,3912.18 5205.58,3908.61 5205.58,3869.24
  region net PB13: 5735.6,3890.87 5768.48,3857.99 5740.23,3855.55 5733.16,3862.62
  region net PB12: 5735.6,3790.87 5768.48,3757.99 5740.23,3755.55 5733.16,3762.62
  region net PB14: 5735.6,3590.87 5768.48,3557.99 5740.23,3555.55 5733.16,3562.62
  region net PB15: 5735.6,3490.87 5768.48,3457.99 5740.23,3455.55 5733.16,3462.62
  region net PA8: 5735.6,3390.87 5768.48,3357.99 5740.23,3355.55 5733.16,3362.62
  region net 12V: 4689.78,3963.43 4643.28,3963.42 4656.7,3941.72 4676.38,3941.73
  region net 5V: 4646.02,2240.68 4646.02,2287.18 4624.32,2283.61 4624.32,2244.24
  region net 5V: 4664.59,2294.87 4697.47,2261.99 4710.29,2279.85 4682.46,2307.69
  region net 3V3: 4596.2,4235.9 4629.61,4202.49 4604.28,4196.65 4590.36,4210.57
  region net PA6: 3830.16,2472.76 3876.97,2466.39 3861.54,2490.74 3851.54,2492.1
  region net PA7: 3749.95,2480.33 3783.79,2447.37 3785.83,2476.15 3778.67,2483.13
  region net PA3: 2568.24,3226.27 2557.71,3240.87 2566.83,3242.59 2572.75,3234.37
  region net PA2: 2330.4,3020.49 2348.42,3020.49 2344.41,3028.9 2334.41,3028.9
  region net 3V3: 4037.35,3858.54 4037.35,3876.56 4045.76,3877.39 4045.76,3857.71
  region net 5V: 2245.55,2855.6 2232.41,2867.91 2226.04,2862.36 2240.42,2848.89
  region net PA1: 2523.52,3163.18 2510.79,3175.91 2519.56,3179.02 2526.63,3171.95
  region net PB6: 2763.6,3464.93 2763.6,3482.93 2755.2,3478.93 2755.2,3468.93
  region net 5V: 4729.17,2429.53 4699.65,2429.53 4694.72,2415.75 4734.09,2415.75
  region net 5V: 4951.3,2761.95 4921.77,2761.95 4916.85,2775.73 4956.22,2775.73
  region net PB12: 4386.47,3173.55 4386.47,3191.55 4379.41,3187.55 4379.41,3177.55
  region net PB13: 4375.16,3200.57 4362.43,3213.3 4359.32,3204.53 4366.39,3197.46
  region net PB13: 5023.51,3613.18 5010.79,3625.91 5019.55,3629.02 5026.63,3621.95
  region net PA11: 5003.51,3643.18 4990.79,3655.91 4999.55,3659.02 5006.63,3651.95
  region net PB12: 5019.48,3569.93 5019.48,3587.93 5027.88,3583.93 5027.88,3573.93
  region net PA8: 5007.54,3485.99 5025.54,3485.99 5021.54,3477.59 5011.54,3477.59
  region net PB15: 5032.54,3510.99 5050.54,3510.99 5046.54,3502.59 5036.54,3502.59
  region net PB14: 5049.48,3544.93 5049.48,3562.93 5057.88,3558.93 5057.88,3548.93
  region net PB11: 4341.39,2668.3 4328.66,2655.57 4337.43,2652.46 4344.5,2659.54
  region net PA3: 3046.91,3499.61 3064.91,3499.61 3060.91,3491.21 3050.91,3491.21
  region net PA1: 3081.66,3465.57 3068.93,3478.3 3065.82,3469.53 3072.89,3462.46
  region net PB10: 5558.6,2834.93 5558.6,2852.93 5550.2,2848.93 5550.2,2838.93
  region net PB0: 4673.6,2564.93 4673.6,2582.93 4665.2,2578.93 4665.2,2568.93
  region net PB0: 4877.54,2761.87 4895.54,2761.87 4891.54,2770.27 4881.54,2770.27
  region net 3V3: 2300.26,2664.48 2318.56,2664.48 2319.25,2655.93 2299.57,2655.93
  region net 3V3: 2523.09,3841.76 2510.17,3854.73 2515.74,3861.25 2529.63,3847.3
  region net PB1: 2570.26,3155.62 2588.56,3155.62 2584.41,3164.17 2574.41,3164.17
  region net PB7: 2828.47,3439.78 2828.47,3458.08 2819.92,3453.93 2819.92,3443.93
  region net PC15: 2510.26,2930.62 2528.56,2930.62 2524.41,2939.17 2514.41,2939.17
  region net PC14: 2548.78,2964.74 2537.4,2950.4 2533.26,2958.94 2539.52,2966.82
  region net PB1: 2532.3,2456.11 2519.36,2443.16 2516.25,2452.14 2523.32,2459.21
  region net PB1: 2543.72,2444.69 2530.77,2431.75 2539.75,2428.64 2546.82,2435.72
  region net PC13: 2279.52,2609.38 2261.37,2611.73 2266.54,2619.67 2276.54,2618.38
  region net PA3: 2171.34,3458.4 2171.34,3476.7 2162.8,3472.55 2162.8,3462.55
  region net 3V3: 2909.18,2354.86 2890.93,2356.33 2890.89,2364.9 2910.58,2363.32
  region net PA0: 2615.16,2960.57 2602.43,2973.3 2599.32,2964.53 2606.39,2957.46
  region net PA0: 2605.41,3060.49 2623.41,3060.49 2619.41,3068.89 2609.41,3068.89
  region net PB10: 5573.86,2701.54 5573.83,2683.54 5582.24,2687.53 5582.25,2697.53
  region net PA12: 5228,2793.53 5228,2811.53 5219.6,2807.53 5219.6,2797.53
  region net 3V3: 4448.6,4064.84 4445.91,4082.63 4454.08,4084.83 4457.05,4065.15
  region net 5V: 2222.84,3517.84 2220.02,3499.75 2211.46,3500.27 2214.52,3519.95
  region net 3V3: 2701.36,4374.61 2719.36,4374.61 2720.2,4366.21 2700.51,4366.21
  region net 3V3: 3950.19,2639.51 3937.46,2626.78 3930.93,2632.12 3944.85,2646.04
  region net PB0: 4979.34,3159.83 4954.34,3159.83 4961.84,3144.83 4971.84,3144.83
  region net PB0: 4954.34,3195.27 4979.34,3195.27 4971.84,3210.27 4961.84,3210.27
  region net 5V: 2694.06,2306.74 2694.06,2217.79 2753.11,2237.85 2753.11,2277.22
  region net 5V: 2611.38,2227.63 2611.38,2326.05 2552.33,2296.52 2552.33,2257.15
  region net 5V: 3009.02,2217.79 3009.02,2306.74 2949.96,2277.22 2949.96,2237.85
  region net 5V: 3091.69,2335.9 3091.69,2258.32 3150.75,2287.85 3150.75,2327.22
  region net PA2: 2861.38,2359.52 2841.69,2359.52 2846.54,2358.93 2856.54,2358.93
  region net PA1: 2792.49,2422.51 2812.17,2422.51 2807.34,2433.13 2797.34,2433.13
  region net PB1: 2762.95,2359.52 2743.27,2359.52 2748.14,2345.33 2758.14,2345.33
  region net PB1: 2743.27,2378.53 2743.27,2403.53 2728.27,2396.03 2728.27,2386.03
  region net PA3: 2147.14,3549.53 2147.14,3569.13 2146.19,3564.33 2146.19,3554.33
  region net PC14: 2624.44,4273.03 2599.44,4273.03 2606.94,4265.08 2616.94,4265.08
  region net PC13: 2672.39,4273.03 2647.39,4273.03 2637.82,4258.03 2651.96,4258.03
  region net 3V3: 2694.64,4359.63 2726.14,4359.63 2720.2,4382.55 2700.51,4382.55
  region net 3V3: 2726.14,4273.03 2694.64,4273.03 2700.49,4243.5 2720.18,4243.5
  region net PA2: 2526.04,4273.03 2501.04,4273.03 2508.54,4271.68 2518.54,4271.68
  region net PC15: 2575.24,4273.03 2550.24,4273.03 2557.74,4265.88 2567.74,4265.88
  region net 3V3: 4446.74,4059.23 4446.74,4090.73 4441.85,4084.83 4441.85,4065.15
  region net 3V3: 4453.47,4090.73 4482.14,4059.23 4495.76,4088.13 4482.49,4102.71
  region net 3V3: 3886.69,2634.24 3886.69,2665.74 3857.17,2659.87 3857.17,2640.19
  region net 3V3: 3922.13,2665.74 3922.13,2634.24 3926.94,2640.19 3926.94,2659.87
  region net 12V: 3702.91,3700.15 3750.16,3837.95 3675.08,3890.11 3622.51,3803.48
  region net 12V: 3750.16,3837.95 3750.16,3700.15 3820.96,3719.84 3820.96,3818.26
  region net 3V3: 4234.75,3759.32 4234.75,3808.54 4221.54,3793.77 4221.54,3774.09
  region net 5V: 5197.53,2942.49 5179.85,2924.82 5195.76,2919.51 5202.83,2926.59
  region net 5V: 5197.53,2986.82 5197.53,2946.02 5227.06,2986.23 5227.06,3014.07
  region net 5V: 5135.53,2924.82 5135.53,2986.82 5076.48,2975.51 5076.48,2936.14
  region net 5V: 4287.99,4159.26 4337.2,4159.26 4322.44,4170.68 4302.75,4170.68
  region net PA11: 5735.54,3976.43 5735.54,4001.43 5720.54,3993.93 5720.54,3983.93
  region net 5V: 4535.53,2232.93 4535.53,2294.93 4476.48,2283.61 4476.48,2244.24
  region net 5V: 4597.53,2294.93 4597.53,2232.93 4656.58,2244.24 4656.58,2283.61
  region net PB0: 4897.07,3266.43 4897.07,3241.43 4912.07,3248.93 4912.07,3258.93
  region net 12V: 4837.76,3270.94 4806.01,3270.94 4811.99,3300.46 4831.68,3300.46
  region net PB0: 4954.34,3236.92 4979.34,3236.92 4971.84,3221.92 4961.84,3221.92
  region net PB0: 4951.01,3266.43 4951.01,3241.43 4936.01,3248.93 4936.01,3258.93
Bottom Layer:
  pour cut-out net S$227004: 5515.91,2302.55 cw(c5639.02,2302.55) 5762.13,2302.55 cw(c5639.02,2302.55) 5515.91,2302.55
  pour cut-out net S$226904: 5517.8,4377.55 cw(c5640.91,4377.55) 5764.02,4377.55 cw(c5640.91,4377.55) 5517.8,4377.55
  pour cut-out net S$1655789: 2047.4,4372.69 cw(c2170.91,4372.69) 2294.41,4372.69 cw(c2170.91,4372.69) 2047.4,4372.69
  pour cut-out net S$1664941: 2047.8,2297.55 cw(c2170.91,2297.55) 2294.02,2297.55 cw(c2170.91,2297.55) 2047.8,2297.55
  region net PC14: 2206.03,2625.68 2206.03,2672.18 2191.54,2653.93 2191.54,2643.93
  region net PC14: 2206.03,2625.68 2206.03,2672.18 2191.54,2653.93 2191.54,2643.93
  region net PA3: 2212.67,3126.65 2200.77,3081.7 2184.26,3104.14 2187.22,3115.32
  region net 3V3: 2149.79,3278.42 2103.29,3278.42 2116.7,3256.72 2136.38,3256.72
  region net 3V3: 2104.74,3320.97 2151.13,3317.8 2139.25,3340.36 2119.57,3341.71
  region net 3V3: 2149.79,3178.42 2103.29,3178.42 2116.7,3156.72 2136.38,3156.72
  region net 3V3: 2149.79,3219.43 2103.29,3219.43 2116.7,3241.13 2136.38,3241.13
  region net 3V3: 2149.79,3078.42 2103.29,3078.42 2116.7,3056.72 2136.38,3056.72
  region net 3V3: 2149.79,3119.43 2103.29,3119.43 2116.7,3141.13 2136.38,3141.13
  region net 3V3: 2149.79,3019.43 2103.29,3019.43 2116.7,3041.13 2136.38,3041.13
  region net 3V3: 2149.79,2978.42 2103.29,2978.42 2116.7,2956.72 2136.38,2956.72
  region net VIN_SW: 3412.24,3918.54 3412.24,4007.12 3370.9,4002.2 3370.9,3923.46
  region net 5V: 5318.98,4322.99 5351.84,4355.89 5364.67,4338.03 5336.85,4310.18
  region net 3V3: 3113.11,4183.57 3150.69,4221.15 3156.4,4191.78 3142.48,4177.86
  region net 3V3: 3079.96,4216.71 3117.55,4254.29 3088.18,4260 3074.26,4246.08
  region net 3V3: 2435.86,2360.68 2435.86,2407.18 2457.56,2393.77 2457.56,2374.09
  region net PA3: 2414.03,2614.9 2446.25,2581.38 2449.25,2609.57 2442.32,2616.78
  region net PA2: 2384.42,2681.99 2417.3,2714.87 2389.05,2717.31 2381.98,2710.24
  region net PA1: 2445.9,2789.2 2406.3,2813.58 2433.1,2822.56 2441.86,2817.18
  region net PC13: 2384.42,3185.88 2417.29,3152.99 2389.04,3150.56 2381.97,3157.63
  region net PB11: 4294.4,2872.09 4250.42,2856.99 4274.19,2842.2 4284.72,2845.82
  region net PB14: 4264.22,3152.97 4296.66,3186.28 4299.47,3158.07 4292.49,3150.9
  region net PB15: 4265.5,3252.93 4235.02,3288.05 4230.59,3260.05 4237.16,3252.48
  region net PA8: 4271.04,3353.38 4234.78,3382.49 4235.4,3354.17 4243.25,3347.87
  region net PA11: 4286.25,3460.68 4286.25,3507.18 4307.95,3488.93 4307.95,3478.93
  region net PA12: 5187.04,2232.57 5187.03,2279.07 5204.13,2260.83 5204.14,2250.83
  region net PA3: 4222.82,4157.52 4182.29,4134.74 4187.39,4162.5 4196.45,4167.59
  region net PA1: 4135.85,4107.75 4089.35,4107.75 4107.6,4086.05 4117.6,4086.05
  region net 5V: 5735.6,3686.99 5768.48,3719.87 5750.61,3732.69 5722.78,3704.85
  region net 5V: 5735.6,3690.87 5768.48,3657.99 5750.61,3645.17 5722.78,3673.01
  region net PB7: 4749.67,4213.09 4702.43,4213.11 4721.04,4191.05 4731.04,4191.05
  region net PB6: 4793.05,4235.88 4826.49,4202.5 4797.73,4200.05 4790.65,4207.12
  region net 3V3: 3972.82,2469.75 3925.57,2469.78 3939.37,2491.82 3959.05,2491.8
  region net VIN_SW: 2145.65,4154.26 2093.47,4206.48 2115.31,4231.78 2170.97,4176.08
  region net PA3: 2557.29,3216.95 2544.56,3229.68 2541.45,3220.91 2548.52,3213.84
  region net PA2: 2330.4,3004.61 2348.42,3004.61 2344.41,2996.2 2334.41,2996.2
  region net 3V3: 4020.4,3875.49 4038.42,3875.49 4039.25,3883.9 4019.57,3883.9
  region net 5V: 2256.39,2866.8 2243.66,2879.53 2249.01,2886.07 2262.93,2872.15
  region net PA1: 2502.53,3155.99 2520.54,3155.99 2516.54,3147.58 2506.54,3147.58
  region net PB6: 2768.21,3462.4 2783.39,3472.06 2784.53,3462.83 2776.09,3457.46
  region net 5V: 4729.17,2455.57 4699.65,2455.57 4694.72,2469.35 4734.09,2469.35
  region net 5V: 4916.89,2750.16 4937.77,2729.28 4931.51,2716.06 4903.67,2743.9
  region net PB12: 4402.35,3173.55 4402.35,3191.55 4410.75,3187.55 4410.75,3177.55
  region net PB13: 4382.35,3203.55 4382.35,3221.55 4390.75,3217.55 4390.75,3207.55
  region net PB13: 5003.6,3604.93 5003.6,3622.93 4995.2,3618.93 4995.2,3608.93
  region net PA11: 4983.6,3634.93 4983.6,3652.93 4975.2,3648.93 4975.2,3638.93
  region net PB12: 5003.6,3569.93 5003.6,3587.93 4995.2,3583.93 4995.2,3573.93
  region net PA8: 5008.6,3484.93 5008.6,3502.93 5000.2,3498.93 5000.2,3488.93
  region net PB15: 5033.6,3509.93 5033.6,3527.93 5025.2,3523.93 5025.2,3513.93
  region net PB14: 5033.6,3544.93 5033.6,3562.93 5025.2,3558.93 5025.2,3548.93
  region net PB11: 4320.41,2675.49 4338.41,2675.49 4334.41,2683.89 4324.41,2683.89
  region net PA3: 3063.86,3516.54 3063.83,3498.54 3072.24,3502.53 3072.25,3512.53
  region net PA1: 3088.86,3486.54 3088.83,3468.54 3097.24,3472.53 3097.25,3482.53
  region net PB10: 5575.5,2835.95 5557.51,2836.03 5561.47,2827.61 5571.47,2827.57
  region net PB0: 4689.48,2564.93 4689.48,2582.93 4697.88,2578.93 4697.88,2568.93
  region net PB0: 4887.29,2741.95 4874.56,2754.68 4871.45,2745.91 4878.52,2738.84
  region net 3V3: 2300.26,2680.62 2318.56,2680.62 2319.25,2689.17 2299.57,2689.17
  region net 3V3: 2502.84,3833.4 2502.84,3851.7 2494.29,3852.39 2494.29,3832.71
  region net PB1: 2570.26,3139.48 2588.56,3139.48 2584.41,3130.93 2574.41,3130.93
  region net PB7: 2844.61,3439.78 2844.61,3458.08 2853.15,3453.93 2853.15,3443.93
  region net PC15: 2510.26,2914.48 2528.56,2914.48 2524.41,2905.93 2514.41,2905.93
  region net PC14: 2540.26,2944.48 2558.56,2944.48 2554.41,2935.93 2544.41,2935.93
  region net PB1: 2543.72,2443.16 2530.77,2456.11 2539.75,2459.21 2546.82,2452.14
  region net PC13: 2281.61,2602.54 2267.87,2590.44 2276.63,2586.77 2284.15,2593.39
  region net PA3: 2188.56,3459.48 2170.26,3459.48 2174.41,3450.93 2184.41,3450.93
  region net 3V3: 2891.34,2338.4 2891.34,2356.7 2882.79,2357.39 2882.79,2337.71
  region net PA0: 2605.41,2980.49 2623.41,2980.49 2619.41,2988.89 2609.41,2988.89
  region net PA0: 2605.41,3044.61 2623.41,3044.61 2619.41,3036.21 2609.41,3036.21
  region net PB10: 5574.94,2700.45 5556.94,2700.52 5560.98,2708.91 5570.98,2708.87
  region net PA12: 5247.91,2803.28 5235.19,2790.55 5243.95,2787.44 5251.03,2794.51
  region net 3V3: 4440.16,4060.57 4427.43,4073.3 4420.9,4067.96 4434.82,4054.04
  region net 5V: 2220.26,3499.48 2238.56,3499.48 2239.25,3490.93 2219.57,3490.93
  region net 5V: 2220.26,3515.62 2238.56,3515.62 2239.25,3524.17 2219.57,3524.17
  region net 3V3: 2718.29,4373.55 2718.29,4391.55 2726.69,4392.39 2726.69,4372.71
  region net 3V3: 3958.42,2619.58 3940.42,2619.61 3939.57,2611.21 3959.25,2611.18
  region net PC15: 2257.54,2546.43 2257.54,2521.43 2272.54,2528.93 2272.54,2538.93
  region net 5V: 2384.36,3757.14 2384.36,3806.35 2354.83,3766.14 2354.83,3738.3
  region net 3V3: 4241.13,3814.93 4290.34,3814.93 4275.58,3844.46 4255.89,3844.46
  region net 5V: 5197.53,2986.82 5197.53,2924.82 5235.94,2937.85 5235.94,2977.22
  region net AO1: 5052.83,4265.43 4989.84,4202.43 5036.6,4162.99 5092.28,4218.67
  region net VIN_SW: 2518.12,4125.73 2518.12,4035.18 2561.51,4041.09 2561.51,4119.83
  region net VIN_SW: 2459.06,4035.18 2459.06,4125.73 2372.98,4231.77 2345.14,4148.25